# EAGLE board senseye-2_temple_r (EAGLE 7.5.0)
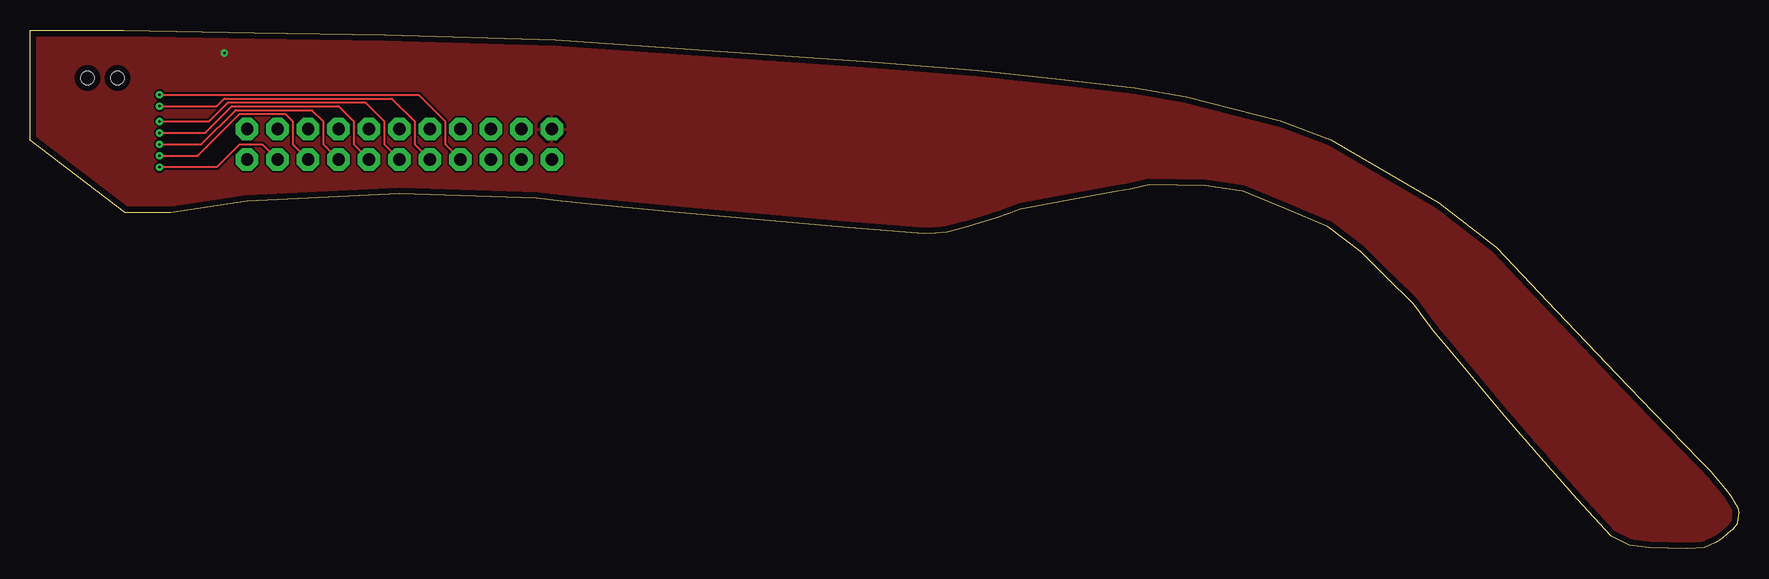
[diagram p0: board, top side]
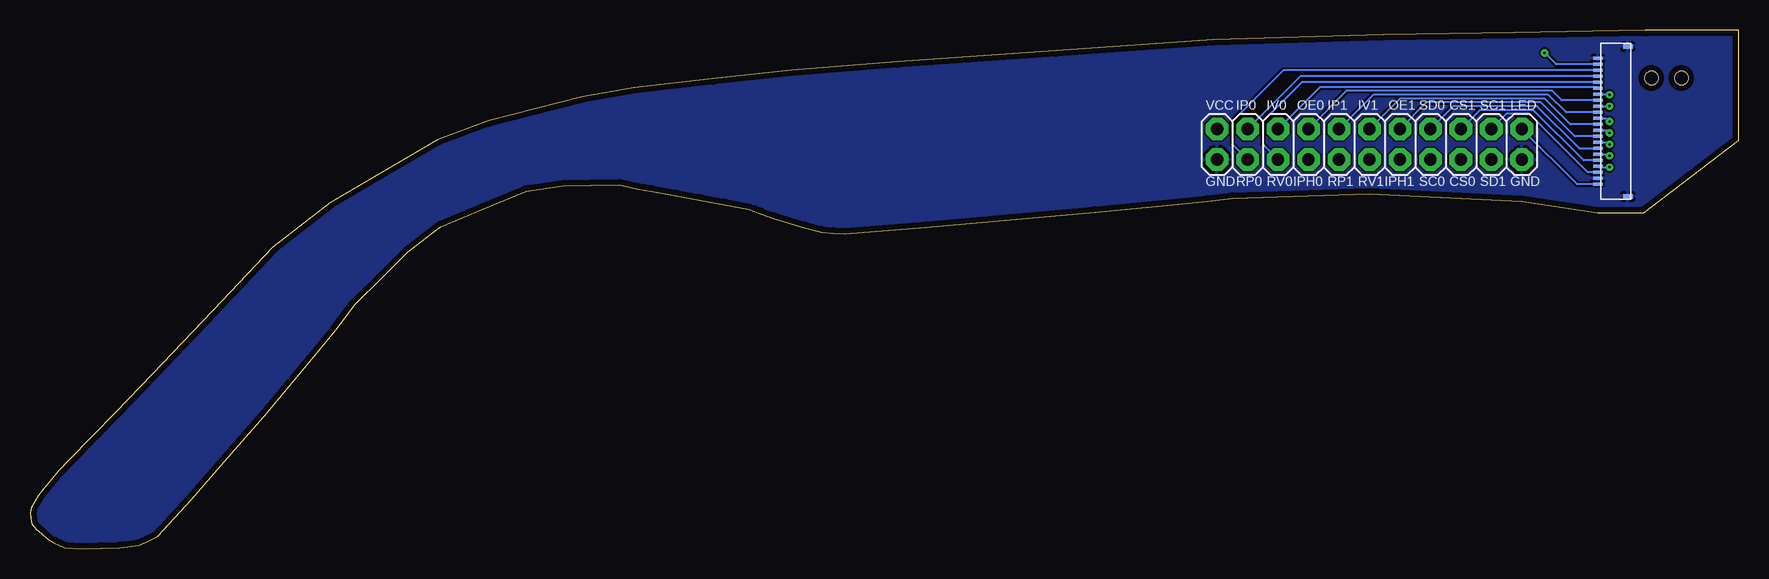
[diagram p1: board, bottom side, seen from below]

Size 142.45 x 43.24 mm. Coordinates in mm from the lower left corner, seen from the top.
Outline: 0,43.24 7.82,43.21 18.72,43.03 29.62,42.84 43.8,42.43 56.95,41.51 70.09,40.58 78.97,39.88 85.54,39.16 92.11,38.43 96.38,37.69 100.31,36.68 104.24,35.66 108.46,34.1 117.45,28.84 122.21,25.14 127.24,19.84 132.27,14.54 135.31,11.4 139.2,7.37 140.05,6.5 140.69,5.75 141.32,5 141.78,4.42 142.06,3.92 142.35,3.42 142.45,2.99 142.37,2.53 142.3,2.08 141.93,1.63 141.47,1.24 141.02,0.86 140.47,0.53 140.02,0.31 139.57,0.09 138.09,0 136.53,0.05 134.97,0.11 133.33,0.3 132.57,0.67 131.81,1.03 128.96,4.14 125.96,7.59 122.95,11.04 119.78,14.83 118.36,16.53 116.95,18.23 115.3,20.44 113.11,22.6 110.93,24.75 108.2,26.85 104.65,28.33 101.09,29.81 98,30.24 95.66,30.28 93.32,30.32 91.74,29.97 91.2,29.89 90.66,29.8 88.61,29.44 86.58,29.07 84.55,28.69 82.55,28.29 82.12,28.13 81.68,27.97 80.5,27.56 77.87,26.77 76.43,26.39 75.48,26.32 74.53,26.24 67.77,26.8 60.73,27.42 53.69,28.05 46.37,28.76 44.3,28.99 42.23,29.22 30.8,29.58 18.1,28.95 11.75,28 7.94,28 0,34.03 0,43.24
Copper layers (1*16): Top 0.0178mm / dielectric 59mil / Bottom 0.0178mm
Design rules "sunstone-2lyr_v1.0.0.3": minimum track width 6mil, minimum drill 14mil, track to track 6mil, track to pad 6mil, pad to pad 6mil, via to via 6mil, smd to smd 6mil, copper to edge 20mil, drill to drill 16mil, minimum pad ring 8mil, minimum via ring 8mil, stop-mask expansion 3mil, vias tented up to drill 50mil, thermal gap 10mil
Holes 1.1 mm at 4.8,39.24 7.3,39.24

## Footprints (pad centres in the part's own frame; a part is rotated, then mirrored left to right if it is on the bottom)
2X11 = drill 1.016 pad 1.88 octagon: 1 -11.43,-1.27; 2 -11.43,1.27; 3 -8.89,-1.27; 4 -8.89,1.27; 5 -6.35,-1.27; 6 -6.35,1.27; 7 -3.81,-1.27; 8 -3.81,1.27; 9 -1.27,-1.27; 10 -1.27,1.27; 11 1.27,-1.27; 12 1.27,1.27; 13 3.81,-1.27; 14 3.81,1.27; 15 6.35,-1.27; 16 6.35,1.27; 17 8.89,-1.27; 18 8.89,1.27; 19 11.43,-1.27; 20 11.43,1.27; 21 13.97,-1.27; 22 13.97,1.27
FH19SC-22S-0.5SH(05) = smd 0.25 x 0.8: 1 -5.25,0; 2 -4.75,0; 3 -4.25,0; 4 -3.75,0; 5 -3.25,0; 6 -2.75,0; 7 -2.25,0; 8 -1.75,0; 9 -1.25,0; 10 -0.75,0; 11 -0.25,0; 12 0.25,0; 13 0.75,0; 14 1.25,0; 15 1.75,0; 16 2.25,0; 17 2.75,0; 18 3.25,0; 19 3.75,0; 20 4.25,0; 21 4.75,0; 22 5.25,0 | smd 0.4 x 0.8: GND0 -6.25,-2.5; GND1 6.25,-2.5

## Placement (x,y rotation side)
J1  M11X2  [2X11]  32.07,33.71 0 bottom
U1  FH19SC-22S-0.5SH(05)  [FH19SC-22S-0.5SH(05)]  11.75,35.62 90 bottom

## Library data of the parts
J1 U1 = senseye-2

## Nets
CS0: J1.15 U1.8
CS1: J1.18 U1.5
GND: J1.1 J1.21 U1.2 U1.22 U1.GND0 U1.GND1
INCP0: J1.4 U1.19
INCP1: J1.10 U1.13
INCV0: J1.6 U1.17
INCV1: J1.12 U1.11
INPHI0: J1.7 U1.16
INPHI1: J1.13 U1.10
LED: J1.22 U1.1
OUTENABLE0: J1.8 U1.15
OUTENABLE1: J1.14 U1.9
RESP0: J1.3 U1.20
RESP1: J1.9 U1.14
RESV0: J1.5 U1.18
RESV1: J1.11 U1.12
SCLK0: J1.17 U1.6
SCLK1: J1.20 U1.3
SDATA0: J1.16 U1.7
SDATA1: J1.19 U1.4
VCC: J1.2 U1.21

## Tracks (layer width: path | path; a pad name or v marks a point on that pad's centre or on a via)
CS0  (via drill 0.2)
  Top 0.152: J1.15 24.45,33.71 24.45,35.62 23.5,36.57 17.14,36.57 14.29,33.71 v10.79,33.71
  Bottom 0.152: U1.8 10.95,33.87 v10.79,33.71
CS1
  Bottom 0.152: J1.18 21.59,36.57 17.14,36.57 12.94,32.37 U1.5
GND
  pour Bottom: -0.32,43.55 142.56,43.55 142.56,0.06 -0.32,0.06
INCP0
  Bottom 0.152: U1.19 36.57,39.37 J1.4
INCP1
  Bottom 0.152: U1.13 14.4,36.37 15.88,37.84 30.48,37.84 J1.10
INCV0
  Bottom 0.152: J1.6 34.92,38.47 11.86,38.47 U1.17
INCV1
  Bottom 0.152: U1.11 14.04,35.37 16.19,37.52 28.26,37.52 J1.12
INPHI0  (via drill 0.2)
  Top 0.152: v10.79,37.84 32.38,37.84 34.61,35.62 34.61,33.71 J1.7
  Bottom 0.152: U1.16 10.82,37.87 v10.79,37.84
INPHI1  (via drill 0.2)
  Top 0.152: v10.79,34.66 14.61,34.66 16.83,36.89 25.72,36.89 26.99,35.62 26.99,33.71 J1.13
  Bottom 0.152: U1.10 11,34.87 v10.79,34.66
LED
  Bottom 0.152: U1.1 13.48,30.37 J1.22
OUTENABLE0
  Bottom 0.152: U1.15 14.77,37.37 15.56,38.16 32.7,38.16 J1.8
OUTENABLE1
  Bottom 0.152: U1.9 13.67,34.37 16.51,37.2 26.04,37.2 J1.14
RESP0
  Bottom 0.152: U1.20 37.98,39.87 42.23,35.62 42.23,33.71 J1.3
RESP1  (via drill 0.2)
  Top 0.152: v10.79,36.89 15.56,36.89 16.19,37.52 30.16,37.52 32.07,35.62 32.07,33.71 J1.9
  Bottom 0.152: U1.14 10.81,36.87 v10.79,36.89
RESV0
  Bottom 0.152: U1.18 36.44,38.87 39.69,35.62 39.69,33.71 J1.5
RESV1  (via drill 0.2)
  Top 0.152: v10.79,35.62 14.92,35.62 16.51,37.2 27.94,37.2 29.53,35.62 29.53,33.71 J1.11
  Bottom 0.152: U1.12 11.04,35.87 v10.79,35.62
SCLK0  (via drill 0.2)
  Top 0.152: J1.17 21.91,33.71 21.91,35.62 21.27,36.25 17.46,36.25 13.97,32.76 v10.79,32.76
  Bottom 0.152: U1.6 10.9,32.87 v10.79,32.76
SCLK1
  Bottom 0.152: J1.20 19.37,36.25 17.46,36.25 12.58,31.37 U1.3
SDATA0
  Bottom 0.152: J1.16 23.81,36.89 16.83,36.89 13.31,33.37 U1.7
SDATA1  (via drill 0.2)
  Top 0.152: J1.19 19.37,33.71 17.46,33.71 15.56,31.81 v10.79,31.81
  Bottom 0.152: U1.4 11.69,31.81 v10.79,31.81
VCC  (via drill 0.2)
  Bottom 0.152: U1.21 15.23,40.37 v16.19,41.33
  pour Top: 142.56,43.55 -0.32,43.55 -0.32,0.06 142.56,0.06

## Text on the board
bNames: LED | SC1 | CS1 | SD0 | OE1 | IV1 | IP1 | OE0 | IV0 | IP0 | VCC | GND | SD1 | CS0 | SC0 | IPH1 | RV1 | RP1 | IPH0 | RV0 | RP0 | GND